# EAGLE board vm_mini_exp5 (EAGLE 6.4)
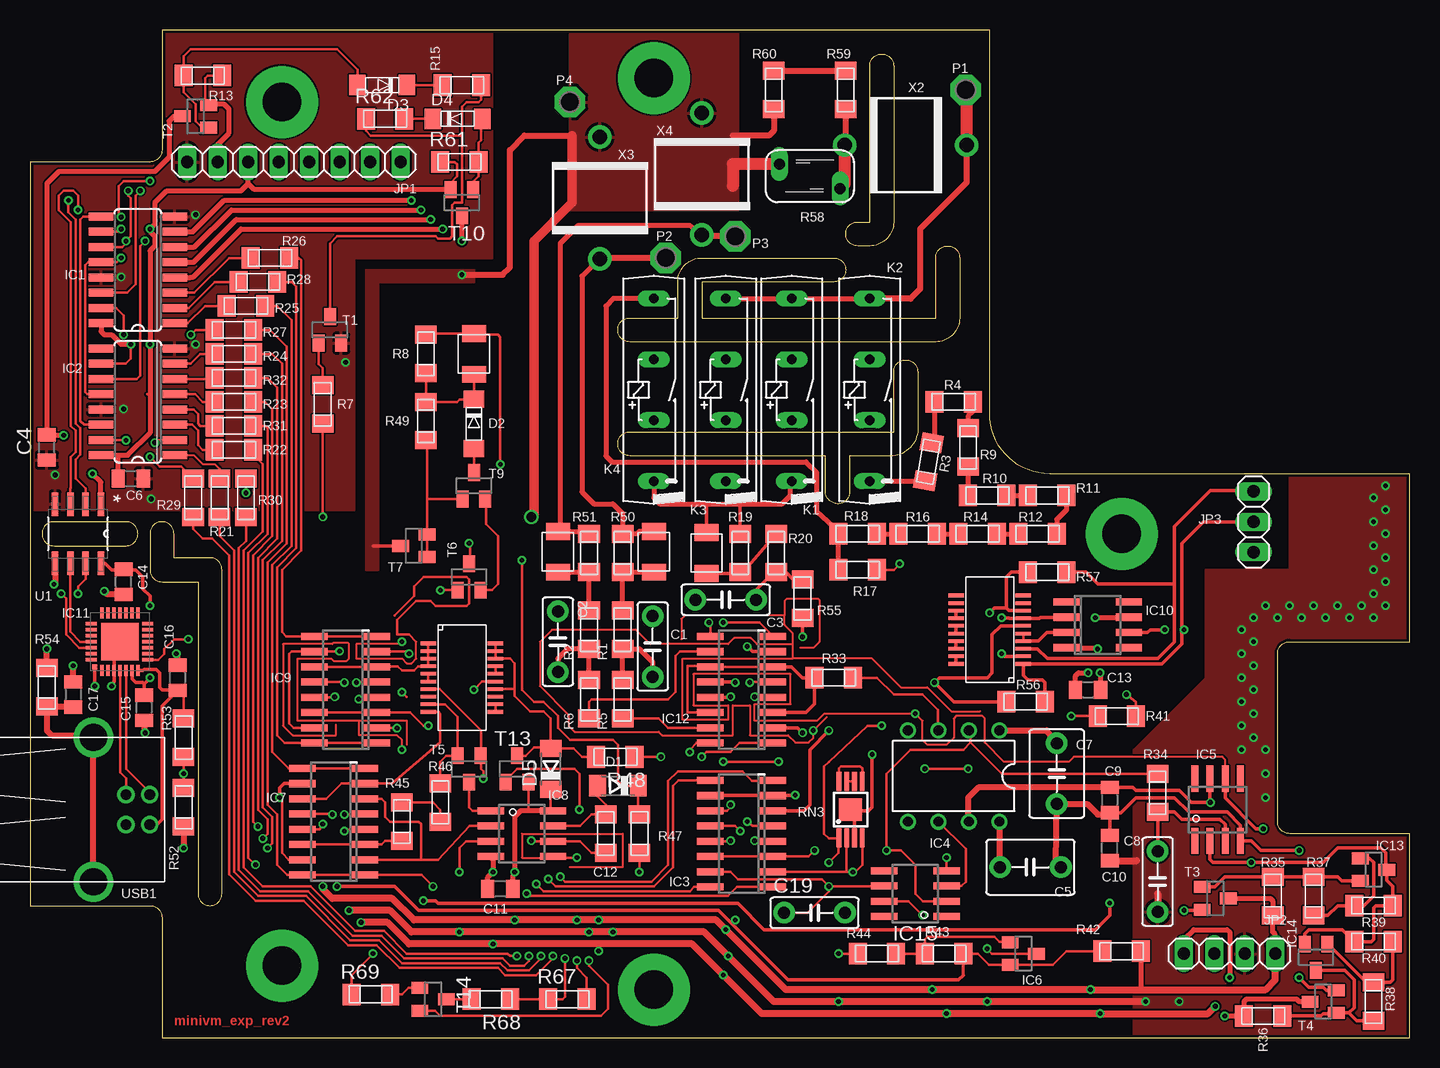
[diagram p0: board, top side]
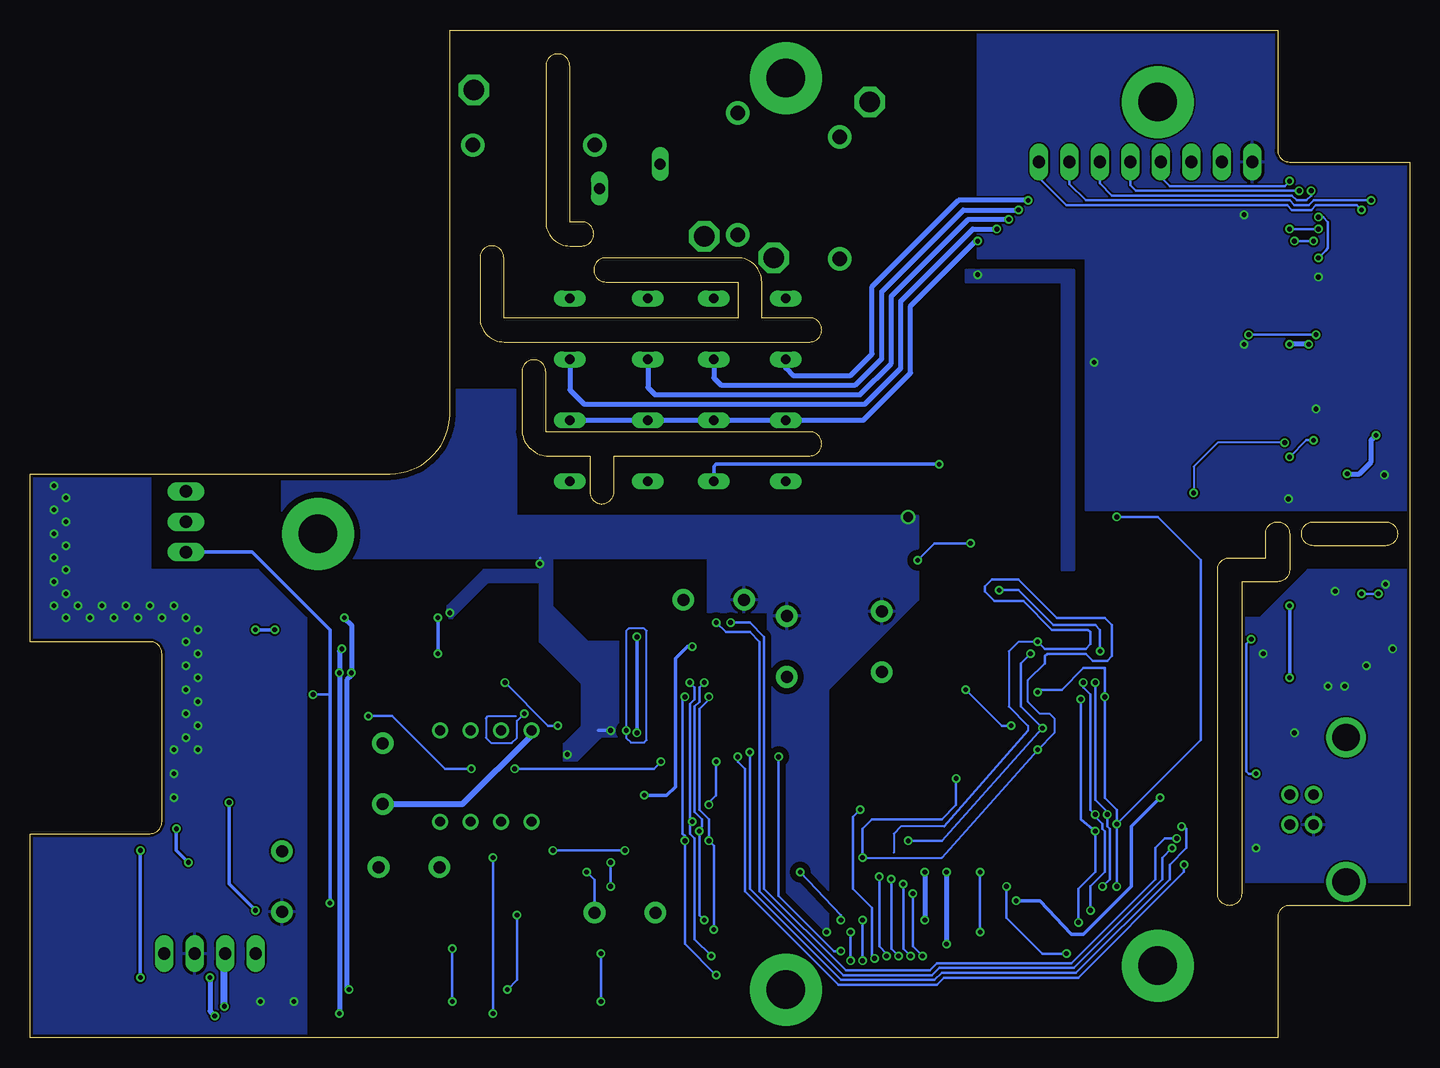
[diagram p1: board, bottom side, seen from below]

Size 115 x 84 mm. Coordinates in mm from the lower left corner, seen from the top.
Outline: 11,84 11,74 arc-90 10,73 0,73 0,11 10,11 arc-90 11,10 11,0 115,0 115,17 105,17 arc-90 104,18 104,32 arc-90 105,33 115,33 115,47 85,47 arc-90 80,52 80,84 11,84
Outline: 50,60 54,60 54,63 arc-90 56,65 67,65 arc-90 68,64 arc-90 67,63 56,63 56,60 75.5,60 75.5,65 arc-90 76.5,66 arc-90 77.5,65 77.5,60 arc-90 75.5,58 50,58 arc-90 49,59 arc-90 50,60
Outline: 50,50.5 72,50.5 72,55.5 arc-90 73,56.5 arc-90 74,55.5 74,50.5 arc-90 71.5,48.5 68.3,48.5 68.3,45.5 arc-90 67.4,44.5 arc-90 66.3,45.5 66.3,48.5 50,48.5 arc-90 49,49.5 arc-90 50,50.5
Outline: 16,12 16,39 arc90 15,40 12,40 12,42 arc90 11,43 arc90 10,42 10,39 arc90 11,38 14,38 14,12 arc90 15,11 arc90 16,12
Outline: 2,43 arc90 1,42 arc90 2,41 8,41 arc90 9,42 arc90 8,43 2,43
Outline: 70,81 arc-90 71,82 arc-90 72,81 72,68 arc-90 70,66 69,66 arc-90 68,67 arc-90 69,68 70,68 70,81
Copper layers (1*16): Top 0.035mm / dielectric 1.5mm / Bottom 0.035mm
Design rules "Fusion_eagle_rule_v1.1": minimum track width 6mil, minimum drill 0.3mm, track to track 6mil, track to pad 6mil, pad to pad 6mil, via to via 6mil, smd to smd 0mil, copper to edge 10mil, drill to drill 10mil, minimum pad ring 10mil, minimum via ring 6mil, stop-mask expansion 2mil, vias tented up to drill 100mil, thermal gap 10mil

## Footprints (pad centres in the part's own frame; a part is rotated, then mirrored left to right if it is on the bottom)
C050-025X075 = drill 1 pad 1.8: 1 -2.54,0; 2 2.54,0
R0805 = smd 1.1 x 1.5: 1 -1.05,0; 2 1.05,0
C050-045X075 = drill 1 pad 1.8: 1 -2.54,0; 2 2.54,0
R_MINIMELF = smd 1.5 x 1.8: P$1 -1.6,0; P$2 1.6,0
SOD80C = smd 1.4 x 1.8: A 1.7,0; C -1.7,0
SOD-80 = smd 1.397 x 1.702: A 1.905,0; K -2.223,0
SO16 = smd 0.66 x 2.032: 1 -4.445,-3.073; 2 -3.175,-3.073; 3 -1.905,-3.073; 4 -0.635,-3.073; 5 0.635,-3.073; 6 1.905,-3.073; 7 3.175,-3.073; 8 4.445,-3.073; 9 4.445,3.073; 10 3.175,3.073; 11 1.905,3.073; 12 0.635,3.073; 13 -0.635,3.073; 14 -1.905,3.073; 15 -3.175,3.073; 16 -4.445,3.073
SO-16 = smd 0.6 x 2.2: 1 -4.445,-2.917; 2 -3.175,-2.917; 3 -1.905,-2.917; 4 -0.635,-2.917; 5 0.635,-2.917; 6 1.905,-2.917; 7 3.175,-2.917; 8 4.445,-2.917; 9 4.445,2.283; 10 3.175,2.283; 11 1.905,2.283; 12 0.635,2.283; 13 -0.635,2.283; 14 -1.905,2.283; 15 -3.175,2.283; 16 -4.445,2.283
DIL08 = drill 0.813 pad 1.27: 1 -3.81,-3.81; 2 -1.27,-3.81; 3 1.27,-3.81; 4 3.81,-3.81; 5 3.81,3.81; 6 1.27,3.81; 7 -1.27,3.81; 8 -3.81,3.81
SO08 = smd 0.6 x 2.2: 1 -1.905,-2.6; 2 -0.635,-2.6; 3 0.635,-2.6; 4 1.905,-2.6; 5 1.905,2.6; 6 0.635,2.6; 7 -0.635,2.6; 8 -1.905,2.6
SOT23 = smd 1 x 1.4: 1 -0.95,-1.1; 2 0.95,-1.1; 3 0,1.1
MLP28 = smd 0.9 x 0.3: 1 -2.4,1.5; 2 -2.4,1; 3 -2.4,0.5; 4 -2.4,0; 5 -2.4,-0.5; 6 -2.4,-1; 7 -2.4,-1.5; 15 2.4,-1.5; 16 2.4,-1; 17 2.4,-0.5; 18 2.4,0; 19 2.4,0.5; 20 2.4,1; 21 2.4,1.5 | smd 0.3 x 0.9: 8 -1.5,-2.3; 9 -1,-2.3; 10 -0.5,-2.3; 11 0,-2.3; 12 0.5,-2.3; 13 1,-2.3; 14 1.5,-2.3; 22 1.5,2.4; 23 1,2.4; 24 0.5,2.4; 25 0,2.4; 26 -0.5,2.4; 27 -1,2.4; 28 -1.5,2.4 | smd 3.1 x 3.1: EXP 0,0 | smd 0.435 x 0.435: M -2.103,2.103
1X08 = drill 1.016 long: 1 -8.89,0; 2 -6.35,0; 3 -3.81,0; 4 -1.27,0; 5 1.27,0; 6 3.81,0; 7 6.35,0; 8 8.89,0
1X04 = drill 1.016 long: 1 -3.81,0; 2 -1.27,0; 3 1.27,0; 4 3.81,0
1X03 = drill 1.016 long: 1 -2.54,0; 2 0,0; 3 2.54,0
HE3621 = drill 0.813 long: 1 -7.62,0; 2 -2.54,0; 3 2.54,0; 4 7.62,0
P1-17 = drill 1.702 pad 2.54 octagon: TP 0,0
S05K175 = drill 0.914 long: 1 -1.016,-2.54; 2 1.016,2.54
OSOP20 = smd 0.3 x 1.27: 1 -2.857,-2.8; 2 -2.223,-2.8; 3 -1.587,-2.8; 4 -0.953,-2.8; 5 -0.318,-2.8; 6 0.318,-2.8; 7 0.953,-2.8; 8 1.587,-2.8; 9 2.223,-2.8; 10 2.857,-2.8; 11 2.857,2.8; 12 2.223,2.8; 13 1.587,2.8; 14 0.953,2.8; 15 0.318,2.8; 16 -0.318,2.8; 17 -0.953,2.8; 18 -1.587,2.8; 19 -2.223,2.8; 20 -2.857,2.8
MSOP8-EP = smd 0.4 x 1.6: 1 -0.975,-2.35; 2 -0.325,-2.35; 3 0.325,-2.35; 4 0.975,-2.35; 5 0.975,2.35; 6 0.325,2.35; 7 -0.325,2.35; 8 -0.975,2.35 | smd 1.9 x 1.9: EP 0,0
SOIC127P600X175-8N = smd 1.981 x 0.559: 1 -2.464,1.905; 2 -2.464,0.635; 3 -2.464,-0.635; 4 -2.464,-1.905; 5 2.464,-1.905; 6 2.464,-0.635; 7 2.464,0.635; 8 2.464,1.905
1210 = smd 1.4 x 2: 1 -1.7,0; 2 1.7,0
USB-B-H = drill 0.914: D+ 0,1.25; D- 1.981,1.25; GND 0,-1.25; VBUS 1.981,-1.25 | drill 2.286: GND@1 -2.718,6.02; GND@2 -2.718,-6.02
EPCOS_N81 = drill 1.2 pad 1.93: 1 -5.08,0; 2 5.08,0

## Placement (x,y rotation side)
C1  4n7  [C050-025X075]  51.9,32.6 270 top
C2  4n7  [C050-025X075]  44,33 270 top
C3  4n7  [C050-025X075]  58,36.5 0 top
C4  100n  [R0805]  1.4,49.2 90 top
C5  100n  [C050-045X075]  83.4,14.2 180 top
C6  100n  [R0805]  8.4,46.6 0 top
C7  100n  [C050-045X075]  85.6,22 90 top
C8  4n7  [C050-025X075]  94,13 90 top
C9  100n  [R0805]  90,19.8 270 top
C10  100n  [R0805]  90,15.8 90 top
C11  100n  [R0805]  39.2,12.4 180 top
C12  330p  [R_MINIMELF]  48,17 90 top
C13  100n  [R0805]  88.2,29 0 top
C14  100n  [R0805]  7.8,38 90 top
C15  1u  [R0805]  9.5,27.5 270 top
C16  1u  [R0805]  12.3,30 270 top
C17  100n  [R0805]  3.6,28.6 270 top
C19  4n7  [C050-025X075]  65.4,10.4 0 top
D1  6v8  [SOD80C]  49,21 180 top
D2  BAV103  [SOD-80]  37,51 270 top
D3  BAV103  [SOD-80]  29.2,79.4 180 top
D4  BAV103  [SOD-80]  35.8,76.6 0 top
D5  4V3  [SOD80C]  43.4,22.4 90 top
IC1  74AHCT595  [SO16]  9,64 90 top
IC2  74AHCT595  [SO16]  9,53 90 top
IC3  DG211  [SO-16]  59,17 90 top
IC4  LTC1052  [DIL08]  77,21.8 180 top
IC5  TL061  [SO08]  99,19 0 top
IC6  TL431_SOT23  [SOT23]  82.8,7 270 top
IC7  DG211  [SO-16]  25,18 90 top
IC8  OPA2192  [SO08]  41,17 270 top
IC9  DG211  [SO-16]  26,29 90 top
IC10  OPA177  [SO08]  89,34.4 270 top
IC11  CP2102  [MLP28]  7.5,33 90 top
IC12  DG211  [SO-16]  59,29 90 top
IC13  TL431_SOT23  [SOT23]  112,14 270 top
IC14  TL431_SOT23  [SOT23]  107.2,6.7 180 top
IC15  TL061  [SO08]  73.8,12 90 top
JP1  [1X08]  22,73 180 top
JP2  [1X04]  100,7 180 top
JP3  [1X03]  102,43 90 top
K1  HE3621  [HE3621]  63.5,54 90 top
K2  HE3621  [HE3621]  70,54 90 top
K3  HE3621  [HE3621]  58,54 90 top
K4  HE3621  [HE3621]  52,54 90 top
P1  TPPAD1-17  [P1-17]  78,79 0 top
P2  TPPAD1-17  [P1-17]  53,65 0 top
P3  TPPAD1-17  [P1-17]  58.8,66.8 0 top
P4  TPPAD1-17  [P1-17]  45,78 0 top
R1  120k  [R_MINIMELF]  49.4,34 90 top
R2  120k  [R_MINIMELF]  46.6,34 90 top
R3  1M  [R_MINIMELF]  74.9,48 260 top
R4  1M  [R_MINIMELF]  77,53 0 top
R5  120k  [R_MINIMELF]  49.4,28.2 90 top
R6  120k  [R_MINIMELF]  46.6,28.2 90 top
R7  62k  [R_MINIMELF]  24.4,52.8 270 top
R8  620R  [R_MINIMELF]  33,57 270 top
R9  1M  [R_MINIMELF]  78.2,49.2 90 top
R10  1M  [R_MINIMELF]  79.8,45.2 0 top
R11  1M  [R_MINIMELF]  84.8,45.2 180 top
R12  1M  [R_MINIMELF]  84,42 180 top
R13  240k  [R_MINIMELF]  14.4,80.2 180 top
R14  1M  [R_MINIMELF]  79,42 0 top
R15  12k  [R_MINIMELF]  36,79.4 180 top
R16  1M  [R_MINIMELF]  74,42 180 top
R17  1M  [R_MINIMELF]  69,39 0 top
R18  1M  [R_MINIMELF]  69,42 0 top
R19  620R  [R_MINIMELF]  59.2,40.4 270 top
R20  240k  [R_MINIMELF]  62.2,40.4 90 top
R21  620R  [R_MINIMELF]  15.8,45 90 top
R22  620R  [R_MINIMELF]  17,49 180 top
R23  620R  [R_MINIMELF]  17,53 180 top
R24  620R  [R_MINIMELF]  17,57 180 top
R25  620R  [R_MINIMELF]  18,61 180 top
R26  620R  [R_MINIMELF]  20,65 180 top
R27  620R  [R_MINIMELF]  17,59 180 top
R28  620R  [R_MINIMELF]  19,63 180 top
R29  620R  [R_MINIMELF]  13.6,45 90 top
R30  620R  [R_MINIMELF]  18,45 90 top
R31  620R  [R_MINIMELF]  17,51 180 top
R32  620R  [R_MINIMELF]  17,55 180 top
R33  22R  [R_MINIMELF]  67,30 0 top
R34  12k  [R_MINIMELF]  94,20.4 270 top
R35  12k  [R_MINIMELF]  103.6,11.8 270 top
R36  12k  [R_MINIMELF]  102.8,1.8 0 top
R37  93k  [R_MINIMELF]  107,11.8 270 top
R38  39k  [R_MINIMELF]  112,3 90 top
R39  39k  [R_MINIMELF]  112,11 180 top
R40  93k  [R_MINIMELF]  112,8 0 top
R41  620R  [R_MINIMELF]  90.6,26.8 0 top
R42  93k  [R_MINIMELF]  91,7.2 0 top
R43  120k  [R_MINIMELF]  76.2,7 180 top
R44  39k  [R_MINIMELF]  70.6,7 0 top
R45  1M  [R_MINIMELF]  31,18 90 top
R46  1M  [R_MINIMELF]  34.2,19.6 90 top
R47  39k  [R_MINIMELF]  50.8,17 90 top
R48  39k  [R_MINIMELF]  48.8,23.4 180 top
R49  240k  [R_MINIMELF]  33,51.4 270 top
R50  620R  [R_MINIMELF]  49.4,40.4 270 top
R51  620R  [R_MINIMELF]  46.6,40.4 270 top
R52  62k  [R_MINIMELF]  12.8,19.2 270 top
R53  39k  [R_MINIMELF]  12.8,25 270 top
R54  620R  [R_MINIMELF]  1.4,29.2 90 top
R55  240k  [R_MINIMELF]  64.4,36.6 90 top
R56  0R  [R_MINIMELF]  83,28 180 top
R57  0R  [R_MINIMELF]  84.8,38.8 180 top
R58  S05K120  [S05K175]  65,71.8 270 top
R59  620K  [R_MINIMELF]  68,79 270 top
R60  620K  [R_MINIMELF]  62,79 90 top
R61  240k  [R_MINIMELF]  35.8,73 0 top
R62  12k  [R_MINIMELF]  29.6,76.6 0 top
R67  240k  [R_MINIMELF]  44.8,3.2 0 top
R68  62K  [R_MINIMELF]  38.4,3.2 180 top
R69  12K  [R_MINIMELF]  28.4,3.6 0 top
RN1  OSOP20  [OSOP20]  80,34 90 top
RN2  OSOP20  [OSOP20]  36,30 270 top
RN3  LT5400  [MSOP8-EP]  68.4,19 0 top
T1  BC847  [SOT23]  25,59 0 top
T2  BC857  [SOT23]  13.8,76.8 90 top
T3  BC847  [SOT23]  98.8,11.6 270 top
T4  BC857  [SOT23]  107.8,3 90 top
T5  MMBFJ110  [SOT23]  36.6,22.4 180 top
T6  MMBFJ175  [SOT23]  36.6,38.4 0 top
T7  JFET_N  [SOT23]  32,41 90 top
T9  BF823  [SOT23]  37,46 0 top
T10  BC857  [SOT23]  36,69.6 180 top
T13  BC857  [SOT23]  40.6,22.4 0 top
T14  BC847  [SOT23]  33.6,3.2 270 top
U1  ADUM1201ARZ  [SOIC127P600X175-8N]  4,42 270 top
U$1  INDUCTOR_GEN1210  [1210]  37,57 90 top
U$2  INDUCTOR_GEN1210  [1210]  56.4,40.4 90 top
U$7  INDUCTOR_GEN1210  [1210]  52,40.5 90 top
U$8  INDUCTOR_GEN1210  [1210]  44,40.5 90 top
USB1  USB-B-H  [USB-B-H]  8,19 0 top
X2  135V  [EPCOS_N81]  73,74.4 0 top
X3  135V  [EPCOS_N81]  47.5,70 270 top
X4  135V  [EPCOS_N81]  56,72 270 top

## Library data of the parts
C1-C3 C5 C7 C8 C19 = _rcl
C4 C6 C9-C17 R1-R57 R59-R62 R67-R69 U$1 U$2 U$7 U$8 = _moja
D1 D5 = diode
D2-D4 IC3 IC6 IC7 IC9 IC12-IC14 RN3 T1-T7 T9 T10 T13 T14 = _mcom6
IC1 IC2 = 74xx-eu
IC4 IC5 IC8 IC15 = _linear
IC10 = linear
IC11 = silabs; MF: FARNELL; MPN: CP2102-GM; OC_FARNELL: 9282130; OC_NEWARK: 30K5635
JP1-JP3 = pinhead-2
K1-K4 = relay
P1-P4 = testpad
R58 = varistor
RN1 RN2 = _moja_e
U1 = _mcom6; MPN: ADUM1201ARZ; OC_FARNELL: 1078200; OC_NEWARK: 19M0753; PACKAGE: SOIC-8; SUPPLIER: Analog Devices
USB1 = con-usb-2
X2-X4 = discrete

## Nets
+5V: C6.1 IC1.10 IC1.16 IC2.10 IC2.16 JP1.6 R61.P$1 T10.2
+18V: C11.1 C13.1 D5.C IC3.13 IC7.13 IC8.8 IC9.13 IC10.7 IC12.13 IC15.7 JP2.1 R7.P$2 R35.P$2 R42.P$2 R47.P$1 R67.P$2 T3.3 T13.2
-14V: C11.2 C13.2 IC3.4 IC7.4 IC8.4 IC9.4 IC10.4 IC12.4 IC15.4 JP2.3 R48.P$1
-18V: JP2.4 R36.P$1 T4.3
AD_HI: IC10.6 JP3.2 R56.P$1 RN1.1
AD_LO: JP3.3 R57.P$1 RN1.3
AGND: C1.1 C2.1 C3.1 C8.1 C10.1 IC3.5 IC3.6 IC6.3 IC7.5 IC8.3 IC9.5 IC12.5 JP2.2 P4.TP R17.P$2 R44.P$1 R57.P$2 R58.1 R60.P$1 RN1.8 RN3.3 RN3.EP T7.3 T14.2 X3.1 X4.1
AGND1: IC14.3 R36.P$2 R38.P$1 T4.1
AMP_OUT: C19.1 IC3.15 IC15.6 R56.P$2 RN1.6 RN3.1
GND: C4.1 C6.2 IC1.8 IC1.13 IC2.8 IC2.13 JP1.8 T1.2 U1.4
GNDIO: C14.1 C15.2 C16.1 C17.1 IC11.3 IC11.EXP IC11.M R52.P$2 R54.P$2 U1.5 USB1.GND
M1_1: IC12.1 R31.P$1
M1_2: IC12.16 R23.P$1
M1_3: IC12.9 R32.P$1
M1_4: IC12.8 R24.P$1
M2_1: IC3.1 R22.P$1
M2_2: IC3.16 R30.P$1
M2_3: IC3.9 R21.P$1
M2_4: IC3.8 R29.P$1
M3_A: IC7.1 IC7.16 R27.P$1 R69.P$1
M3_B: IC7.8 IC7.9 R25.P$1
M3_C: IC9.1 IC9.16 R28.P$1
M3_D: IC9.8 IC9.9 R26.P$1
N$1: JP1.1 U1.3
N$2: JP1.2 U1.2
N$3: IC11.4 USB1.D+
N$4: IC11.5 USB1.D-
N$5: C16.2 IC11.7 R53.P$1 USB1.VBUS
N$6: IC3.7 IC3.10 IC12.7
N$7: RN3.5 RN3.8
N$8: C19.2 IC3.2 RN3.2 RN3.4
N$9: RN3.6 RN3.7
N$15: R3.P$1 R4.P$1
N$16: IC12.3 IC12.6 IC12.11 IC12.14 R33.P$1
N$17: R4.P$2 R9.P$2
N$18: R9.P$1 R10.P$1
N$19: R10.P$2 R11.P$2
N$20: R11.P$1 R12.P$1
N$21: R12.P$2 R14.P$2
N$22: R14.P$1 R16.P$1
N$23: R16.P$2 R18.P$2
N$24: K4.4 R17.P$1 R18.P$1
N$25: K2.1 R3.P$2
N$26: IC1.5 K1.3
N$27: R19.P$2 R20.P$2 U$2.1
N$28: IC1.4 K2.3
N$29: IC1.6 K3.3
N$30: C3.2 R20.P$1 R55.P$2
N$31: IC4.3 R33.P$2
N$32: IC1.7 K4.3
N$33: C1.2 R1.P$1 R5.P$2
N$34: IC5.2 IC5.6 IC13.3 IC14.2 R39.P$1 R40.P$1
N$35: C5.2 IC4.8
N$36: C7.2 IC4.1
N$37: C2.2 R2.P$1 R6.P$2
N$38: IC12.15 R5.P$1
N$39: R58.2 R59.P$2 X2.1
N$40: C8.2 IC5.3 R34.P$2
N$41: IC12.10 R6.P$1
N$42: RN1.19 RN1.20
N$43: IC8.5 RN2.7 T5.1
N$44: IC1.9 IC2.14
N$45: RN1.17 RN1.18
N$46: IC1.15 R27.P$2
N$47: IC1.1 R25.P$2
N$48: IC1.2 R28.P$2
N$49: IC1.3 R26.P$2
N$50: IC11.26 U1.7
N$51: IC11.25 U1.6
N$52: C14.2 C15.1 IC11.6 U1.8
N$53: IC11.8 R52.P$1 R53.P$2
N$54: IC2.15 R29.P$2
N$55: IC2.1 R21.P$2
N$56: C17.2 R54.P$1 USB1.GND@1 USB1.GND@2
N$57: R15.P$1 R62.P$1 T1.3
N$58: IC3.3 IC3.14 IC4.2 IC15.2 R34.P$1
N$59: IC2.2 R30.P$2
N$60: IC2.3 R22.P$2
N$61: D3.A R13.P$2 T2.1
N$62: D4.K R62.P$2
N$63: IC2.4 R31.P$2
N$64: R7.P$1 T1.1
N$65: IC12.2 R55.P$1
N$66: R59.P$1 R60.P$2
N$67: IC3.11 R41.P$1
N$68: IC2.7 R24.P$2
N$69: IC2.6 R32.P$2
N$70: IC2.5 R23.P$2
N$71: RN2.5 RN2.6
N$72: RN2.11 RN2.12
N$73: IC9.3 IC9.14 RN2.15
N$74: C12.P$1 IC8.6 IC9.2 IC9.7
N$75: IC9.6 IC9.11 RN2.1 RN2.2 RN2.3 RN2.4
N$76: IC7.3 IC7.14 R45.P$1
N$77: RN2.16 RN2.17
N$78: IC8.1 T5.3
N$79: R46.P$2 RN2.9 T5.2
N$80: IC9.10 IC9.15 T6.1
N$81: IC7.7 IC7.11 RN2.10
N$82: IC13.2 R35.P$1 R37.P$1 T3.1
N$83: IC13.1 R37.P$2 R39.P$2
N$84: C12.P$2 D1.A IC8.7
N$85: R45.P$2 R46.P$1
N$86: D1.C R47.P$2 T6.3
N$87: IC7.2 IC7.6 IC8.2
N$88: R49.P$2 T7.1 T7.2 T9.1
N$89: RN1.15 RN1.16
N$90: RN1.13 RN1.14
N$91: IC6.1 R43.P$2 R44.P$2
N$92: IC14.1 R38.P$2 R40.P$2
N$93: T6.2 T9.2
N$94: D2.A T9.3
N$95: IC10.3 RN1.4 RN1.5
N$96: IC10.2 RN1.2 RN1.7
N$98: P3.TP R51.P$1 U$8.2 X4.2
N$99: P2.TP R50.P$1 U$7.2 X3.2
N$100: K1.1 K4.1 R19.P$1 U$2.2
N$101: K3.1 R8.P$1 U$1.2
N$102: JP1.7 R13.P$1 T2.2
N$103: D4.A R61.P$2 T10.1
N$104: IC4.6 IC15.3
N$106: C4.2 T2.3 U1.1
N$107: D3.K R15.P$2
N$108: D5.A R48.P$2 RN2.14 RN2.18 RN2.19 RN2.20 T13.3
N$117: R67.P$1 R68.P$1 T13.1
N$118: R68.P$2 T14.3
N$119: R69.P$2 T14.1
OHM_CUR: D2.K R8.P$2 R49.P$1 U$1.1
SR_CLK: IC1.11 IC2.11 JP1.3
SR_DAT: IC1.14 JP1.4
SR_LAT: IC1.12 IC2.12 JP1.5
T_INP: K1.4 K2.4 K3.4 P1.TP X2.2
T_SENH: R1.P$2 R50.P$2 U$7.1
T_SENL: R2.P$2 R51.P$2 U$8.1
V+: C9.1 IC4.7 IC5.7 T3.2
V-: C5.1 C7.1 C9.2 C10.2 IC4.4 IC5.4 T4.2
V_REL: K1.2 K2.2 K3.2 K4.2 T10.3
VCC: IC3.12 IC6.2 IC7.12 IC9.12 IC12.12 R42.P$1 R43.P$1
VREF-7V: IC7.10 IC7.15 JP3.1 R41.P$2

## Tracks (layer width: path | path; a pad name or v marks a point on that pad's centre or on a via)
+5V  (via drill 0.4)
  Top 0.2: 9.77,53.63 10,53.6 | IC2.10 7.97,56.17 8.4,56.6 v8.4,57.8 | IC1.10 7.38,67.17 v7.6,67.4 | T10.2 35.05,71.25 35.6,71.8 35.6,72.8 35.4,73 R61.P$1
  Top 0.4: IC2.16 7.4,48.55 | 7.4,48.55 8.15,48.55 10,50.4 10,53.6 v10,57.8 10,65.6 10.4,66 10.4,66.8 10,67.2 v10,67.4 10.4,67.8 10.4,69.6 11.4,70.6 17.6,70.6 18.2,71.2 | C6.1 7.35,48.51 7.4,48.55 | IC1.16 5.93,58.87 6.2,58.6 6.8,58.6 7.6,57.8 v8.4,57.8 | T10.2 18.7,70.7 18.2,71.2 | 18.2,71.2 JP1.6
  Bottom 0.2: v7.6,67.4 v10,67.4 10.2,67.6
  Bottom 0.4: v8.4,57.8 v10,57.8
+18V  (via drill 0.4)
  Top 0.2: IC7.13 24.16,17.36 v24.4,17.8 | IC9.13 25.36,28.36 v25.4,28.4 | 58.23,28.36 v58.4,28.4 | 31.41,28.41 v31,28.8 | v24.4,43.4 R7.P$2 | R47.P$1 v50.8,13.8 | IC3.13 58.37,16.36 v58.4,16.4 | D5.C 43.4,19.11 IC8.8 | T13.2 41.55,18.95 41.6,18.91 | R67.P$2 46.4,5 45.6,5.8 v45.6,6.4 | IC15.7 73.23,11.37 v74.4,10.2
  Top 0.3: IC12.13 58.4,28.36 v58.4,28.4
  Top 0.4: IC8.8 41.6,18.91 40.91,18.91 40.4,18.4 v40.4,13.8 40.25,13.45 C11.1 | IC10.7 91.17,35.03 90.8,35 v88.8,35 | C13.1 87.15,30.15 87.4,30.4 v88.2,30.4 | JP2.1 103.81,8.59 103.6,8.8 R35.P$2 103.6,11.4 103.4,11.6 T3.3 | R42.P$2 92.6,4
  Top 0.6: v24.4,12.6 24.4,12.4 25.2,11.6 30.2,11.6 32,9.8 v40.4,9.8 v45.6,9.8 v47.4,9.8 57.2,9.8 v58,9 63,4 v75.2,4 v88.4,4 92.6,4 103,4 103.8,4.8 JP2.1
  Bottom 0.2: v24.4,17.8 v24.4,12.6 | v24.4,17.8 24.4,19 25.4,20 v25.4,28.4 25.4,30.8 27.2,30.8 29,29 30.8,29 v31,28.8 | v58,9 58,16 v58.4,16.4 58.4,18.2 59.2,19 59.2,27.4 58.4,28.2 v58.4,28.4 | v50.8,13.8 47.4,10.2 v47.4,9.8 | v24.4,43.4 21,43.4 17.4,39.8 17.4,24.8 v24.4,17.8 | v45.6,6.4 v45.6,9.8 | v74.4,10.2 74.4,4.8 v75.2,4
  Bottom 0.4: v40.4,13.8 v40.4,9.8 | v88.8,35 88.2,34.4 v88.2,30.4 88.2,30.2 88.6,29.8 88.6,4.2 v88.4,4
-14V  (via drill 0.4)
  Top 0.2: IC7.4 26.64,17.36 v26.2,17.2 | IC9.4 27.57,28.36 v27.4,28.2 | v60.4,28.4 61.88,28.4 IC12.4 | 88.91,32.49 v89,32.4 | IC3.4 60.44,16.36 v60.4,16.4 | R48.P$1 v52.6,23.4 | v47.4,7.2 47.4,7.8 | IC15.4 v76.4,15
  Top 0.4: IC8.4 38.51,14.89 38.6,14.8 v38.6,13.8 38.15,13.35 C11.2 | IC10.4 88.91,32.49 | C13.2 89.25,30.35 v89.2,30.4
  Top 0.6: v27.6,9.6 29.8,9.6 31.6,7.8 v38.6,7.8 47.4,7.8 55.2,7.8 v57.8,5.2 61,2 v76.4,2 v89.2,2 98.2,2 v98.8,2.6
  Bottom 0.2: v27.6,9.6 27.6,12.4 26.2,13.8 v26.2,17.2 27.4,18.2 v27.4,28.2 | v57.8,5.2 60.4,7.8 v60.4,16.4 60.4,16.8 60.6,17 60.6,28.2 v60.4,28.4 | v52.6,23.4 52.6,11.8 48,7.2 v47.4,7.2 | v76.4,15 v76.4,2
  Bottom 0.4: v38.6,13.8 v38.6,7.8 | v89,32.4 89.2,32.2 v89.2,30.4 v89.2,2
  Bottom 0.6: v98.8,2.6 98.8,6.93 JP2.3
-18V  (via drill 0.4)
  Top 0.4: JP2.4 96.19,8.19 97,9 99.8,9 100,8.8 v100,5 | v99.6,1.8 R36.P$1 101.2,3 101.4,3.2 105.6,3.2 105.8,3 T4.3
  Bottom 0.4: v100,5 100,2.2 v99.6,1.8
AD_HI  (via drill 0.4)
  Top 0.3: 96,34 96,32.8 94.34,31.14 RN1.1 82.8,30.2 83.2,29.8 84.4,29.8 84.6,29.6 R56.P$1 | 96,34 96,41.2 97.8,43 JP3.2 | v94.6,34 93.4,34 93.17,33.77 IC10.6 91.56,33.8 | v96.2,34 96,34
  Bottom 0.3: v94.6,34 v96.2,34
AD_LO
  Top 0.2: 101.94,45.6 JP3.3
  Top 0.3: RN1.3 83.99,32.41 84.8,31.6 94,31.6 95.4,33 95.4,37.8 | 95.4,37.8 95.4,42.6 98.4,45.6 101.94,45.6 | 95.4,37.8 89,37.8 88,38.8 R57.P$1
AGND  (via drill 0.4, 0.8)
  Top 0.2: IC9.5 27.23,29.64 v27.2,29.6 | v26.2,18.6 27.88,18.6 IC7.5 | v59.8,18 60.23,17.64 IC3.5 | 60.03,29.64 v60,29.6 60,29.64 IC12.5 | v79.8,7.4 80.2,7 IC6.3 | R44.P$1 v67.4,7 | 68.72,18.68 RN3.EP | R17.P$2 72,39 v72.5,39.5 | IC8.3 36.37,16.36 35.8,15.8 v35.8,13.8 | T14.2 33.75,2.25 34.2,1.8 47.6,1.8 48.2,2.4 48.2,4.4 46.6,6 v46.6,6.4
  Top 0.3: RN3.3 68.72,18.68 | v70.2,23.6 70.2,19.2 69.91,18.91 68.31,18.91 RN3.EP | RN1.8 81.61,35.59 81.4,35.8 | 81.4,35.8 80.4,35.8 v80,35.4 | T7.3 28.6,41 | IC3.6 64.5,18.91 65,19.4 65,24 v66.6,25.6 | R57.P$2 81.8,38.8 81.4,38.4 81.4,35.8
  Top 0.5: v36,63.6 39.4,63.6 40,64.2 40,74 41.2,75.2 45.2,75.2 | R60.P$1 62,75.6 61.6,75.2 58.6,75.2
  Top 0.6: v93,3 v79.8,3 v67.4,3 62,3 v58.2,6.8 56.2,8.8 v48.6,8.8 v46.6,8.8 v35.8,8.8 31.8,8.8 30,10.6 v26.6,10.6 | C10.1 92.25,14.75 | 94,12 C8.1
  Top 0.8: 45.2,75.2 45.2,69.6 42,66.4 42,43.6 v41.8,43.4
  Top 1: R58.1 58.6,72.82 58.6,71
  Bottom 0.2: v27.2,29.6 27.2,29.2 26.6,28.6 26.6,19 v26.2,18.6 26.2,18.4 25.6,17.8 25.6,17.4 25.4,17.2 25.4,13.8 26.6,12.6 v26.6,10.6 | v58.2,6.8 59.6,8.2 59.6,16.6 60,17 60,17.8 v59.8,18 60,18.2 60,27.8 59.6,28.2 59.6,29.2 v60,29.6 | v79.8,7.4 v79.8,3 | v67.4,7 v67.4,3 | v72.5,39.5 72.5,40 | v35.8,13.8 v35.8,8.8 | v46.6,6.4 v46.6,8.8
  Bottom 0.3: 72.4,39.4 v72.5,39.5 | v66.6,25.6 67.6,25.6
  Bottom 0.8: v41.8,43.4 41.8,43.2
  other vias: 113,36 111,36 109,36 107,36 105,36 103,36 101,34 101,32 101,30 101,28 101,26 101,24 103,24 103,22 103,20 113,38 113,40 113,42 113,44 113,46 102,25 102,27 102,31 102,33 102,35 104,35 106,35 108,35 110,35 112,35 112,37 112,39 112,41 112,43 112,45 102,29 95.8,3
  pour Bottom (isolate 0.5): 80,54 74.5,54 74.5,43.5 41,43.5 41,36.5 48.5,29 48.5,8.5 53.5,8.5 53.5,35.5 58.5,35.5 58.5,40 71.5,40 71.5,36 68.5,33 65.5,33 65.5,25.1 67.5,25.1 67.5,25 69.5,23 70.5,23 70.5,24.5 69,26 69,29.5 72.5,33 72.5,38 76.8,38 79.8,35 80.2,35 80.2,36 77.2,39 72.5,39 72.5,40 94,40 94,47 83,47 80,50
  pour Top: 45,84 45,69 59,69 59,84
  pour Bottom: 115,0 92,0 92,35 96,39 105,39 105,47 115,47 115,33 105,33 104,32 104,18 105,17 115,17
  pour Top: 115,33 115,47 105,47 105,39 98,39 98,30 92,24 92,0 115,0 115,17 105,17 104,18 104,32 105,33
  pour Top: 28,39 29,39 29,63 37,63 37,64 28,64
  pour Bottom: 29,39 29,63 37,63 37,64 28,64 28,39
AGND1
  Top 0.3: 109.95,2.05 T4.1 108.85,2 107.8,2 107.6,1.8 R36.P$2 | 109.95,2.05 110.6,1.4 R38.P$1 | 109.95,2.05 110.4,2.5 110.4,4.8 109.6,5.6 IC14.3
AMP_OUT  (via drill 0.4)
  Top 0.2: v71,26 69.8,26 66.6,23 66.2,22.6 66.2,17 66.6,16.6 67.38,16.6 RN3.1 67.4,16.62 67.4,15.4 v66.6,14.6 | v66.6,12.6 66,13.2 59,13.2 58.38,13.82 IC3.15 | IC15.6 71.17,12.63 71,12.6 v66.6,12.6 | C19.1 64.8,10.4 66.6,12.2 v66.6,12.6
  Top 0.3: RN1.6 80.92,34.32 80.2,33.6 80.2,30.4 79.8,30 75.8,30 v75.4,29.6 77,28 R56.P$2
  Bottom 0.2: v71,26 71.8,26 v75.4,29.6 | v66.6,12.6 v66.6,14.6
GND  (via drill 0.4)
  other vias: 7.6,63.4 13.8,68.6 13.8,57.8 7.8,52.4 10.1,44.9 2.1,46.9 26.3,56.3
  pour Top: 0,44 27,44 27,65 38.5,65 38.5,84 11,84 11,73 0,73
  pour Bottom: 0,44 27,44 27,65 36,65 36,84 11,84 11,73 0,73
GNDIO  (via drill 0.4)
  Top 0.3: IC11.EXP 7,32.5 IC11.3 7,29.7 v6.8,29.3 | IC11.M 5.4,30.6 v5.4,29.3
  Top 0.5: C16.1 12.3,31.9 v12.2,32 | C15.2 9.5,25.5 v9.6,25.4 | R52.P$2 v12.8,15.8 | U1.5 2.1,37.9 v2,37.8 | C14.1 6.45,36.95 v6.2,37.2 | R54.P$2 v1.4,32.4 | C17.1 v3.6,31
  pour Bottom: 0,13 14,13 14,35 12.5,35 8.5,39 0,39
M1_1  (via drill 0.4)
  Top 0.2: v56,23.4 56.4,23.8 58.4,23.8 59.16,24.55 IC12.1 | R31.P$1 19.6,51 19.8,50.8 19.8,42 18.2,40.4 18.2,15 v18.8,14.4
  Bottom 0.2: v56,23.4 56,23 55.4,22.4 55.4,12.2 47.6,4.4 39.4,4.4 38.8,5 27.6,5 18.8,13.8 v18.8,14.4
M1_2  (via drill 0.4)
  Top 0.2: v55,23.8 55,24 55.55,24.55 IC12.16 | R23.P$1 19.6,53 20.2,52.4 20.2,41.8 18.6,40.2 18.6,18 v19,17.6
  Bottom 0.2: v55,23.8 55,12.4 47.4,4.8 39.6,4.8 39,5.4 27.8,5.4 20,13.2 20,14.4 18.6,15.8 18.6,17.4 v19,17.6
M1_3  (via drill 0.4)
  Top 0.2: v56.6,34.6 56.72,34.48 IC12.9 | R32.P$1 19.8,55 20.6,54.2 20.6,41.6 19,40 19,19 19.8,18.2 19.8,17 v19.4,16.6
  Bottom 0.2: v56.6,34.6 55,34.6 53.8,33.4 53.8,12.4 47,5.6 40,5.6 39.4,6.2 28.2,6.2 21.2,13.2 21.2,15.8 20.4,16.6 v19.4,16.6
M1_4  (via drill 0.4)
  Top 0.2: v57.8,34.6 60.8,34.6 61.92,33.48 IC12.8 | R24.P$1 20.2,57 21,56.2 21,41.4 19.4,39.8 19.4,19.2 20.2,18.4 20.2,16.2 v19.8,15.8
  Bottom 0.2: v57.8,34.6 57,33.8 55,33.8 54.2,33 54.2,12.2 47.2,5.2 39.8,5.2 39.2,5.8 28,5.8 20.6,13.2 20.6,15 v19.8,15.8
M2_1  (via drill 0.4)
  Top 0.2: v41.4,12 41.6,11.8 58.2,11.8 58.95,12.55 IC3.1 | v40.6,6.8 40,6.8 39.8,7 31.4,7 29.5,8.9 27.1,8.9 23.4,12.6 19.4,12.6 17.8,14.2 17.8,40.6 19.4,42.2 19.4,47.8 18.6,48.6 R22.P$1
  Bottom 0.2: v41.4,12 41.4,7.6 v40.6,6.8
M2_2  (via drill 0.4)
  Top 0.2: v42.2,12.8 42.8,12.2 55,12.2 55.35,12.55 IC3.16 | v41.6,6.8 41.6,6.4 41.2,6 40,6 39.4,6.6 31.2,6.6 29.3,8.5 26.9,8.5 23.2,12.2 19.2,12.2 17.4,14 17.4,40.8 18,41.4 R30.P$1
  Bottom 0.2: v42.2,12.8 42.2,7.4 v41.6,6.8
M2_3  (via drill 0.4)
  Top 0.2: v43.2,13.2 43.8,12.6 52,12.6 53.6,14.2 53.6,21 54.05,21.45 IC3.9 | v42.6,6.8 42.6,6.6 41.6,5.6 39.8,5.6 39.2,6.2 31,6.2 29.1,8.1 26.7,8.1 23,11.8 19,11.8 17,13.8 17,40.6 15.8,41.8 R21.P$1
  Bottom 0.2: v43.2,13.2 43.2,7.4 v42.6,6.8
M2_4  (via drill 0.4)
  Top 0.2: v44.2,13.4 44.6,13 51.8,13 53.2,14.4 53.2,21.4 54,22.2 59.4,22.2 60.2,21.4 61.87,21.4 IC3.8 | v43.6,6.8 43.6,6.6 42.2,5.2 39.6,5.2 39,5.8 30.8,5.8 28.9,7.7 26.5,7.7 22.8,11.4 18.8,11.4 16.6,13.6 16.6,40.2 15.2,41.6 14.4,41.6 13.6,42.4 R29.P$1
  Bottom 0.2: v44.2,13.4 44.2,7.6 43.6,7 v43.6,6.8
M3_A  (via drill 0.4)
  Top 0.2: R27.P$1 20,59 21.4,57.6 21.4,41.2 19.8,39.6 19.8,19.4 20.6,18.6 20.6,14.4 21.45,13.55 IC7.16 IC7.1 32.65,13.55 v33.6,12.6 | R69.P$1 26.8,5.2 v28.6,7
  Bottom 0.2: v28.6,7 30.6,7 33.6,10 v33.6,12.6
M3_B
  Top 0.2: IC7.8 IC7.9 21.55,22.45 20.2,23.8 20.2,39.4 21.8,41 21.8,59.8 20.6,61 R25.P$1
M3_C
  Top 0.2: IC9.1 IC9.16 21.25,24.55 20.6,25.2 20.6,39.2 22.2,40.8 22.2,62.6 21.8,63 R28.P$1
M3_D
  Top 0.2: IC9.8 IC9.9 21.36,33.45 21,33.8 21,39 22.6,40.6 22.6,64.8 22.4,65 R26.P$1
N$1  (via drill 0.4)
  Top 0.2: v4,69 4,70.2 3.6,70.6 2.8,70.6 2.4,70.2 2.4,69 3.4,68 3.4,51 3.8,50.6 3.8,48.8 3.4,48.4 3.4,45.8 3.37,45.77 U1.3
  Bottom 0.2: JP1.1 30.89,71.69 28.6,69.4 10.2,69.4 9.8,69 8.2,69 7.8,69.4 4.4,69.4 v4,69
N$2  (via drill 0.4)
  Top 0.2: v3.2,69.8 3.2,68.8 3.8,68.2 3.8,51.2 4.2,50.8 4.2,48.6 3.8,48.2 3.8,46.6 4.63,45.77 U1.2
  Bottom 0.2: JP1.2 28.35,71.15 27,69.8 10,69.8 9.6,69.4 8.4,69.4 8,69.8 v3.2,69.8
N$3
  Top 0.2: IC11.4 7.5,22.1 8,21.6 USB1.D+
N$4
  Top 0.2: IC11.5 8,22.4 10,20.4 10,20.27 USB1.D-
N$5
  Top 0.2: 12.45,29 C16.2 12.8,28.45 R53.P$1
  Top 0.3: IC11.7 9.4,30.6 9.5,30.7 10.5,30.7 10.8,30.4 10.8,29.2 11,29 12.45,29 | USB1.VBUS 10.55,17.75 11,18.2 11,27.65 C16.2
N$6  (via drill 0.4)
  Top 0.3: IC12.7 60.23,32.17 v59.8,32.6 | v63.8,20.2 61.94,20.2 IC3.7 IC3.10
  Bottom 0.3: v59.8,32.6 60.2,32.6 61.2,31.6 61.2,20.89 IC3.7 63.77,20.18 v63.8,20.2
N$7
  Top 0.2: RN3.8 67.42,22.43 67.6,22.6 69.2,22.6 69.38,22.43 RN3.5
N$8  (via drill 0.4)
  Top 0.2: 68,13.82 68.6,13.82 | 68.6,13.82 68.83,13.82 69.4,14.4 69.4,16.62 RN3.4 | RN3.2 68.08,13.9 68,13.82 | IC3.2 68,13.82 | v68.6,13.8 68.6,13.82
  Bottom 0.2: C19.2 67.94,13.14 v68.6,13.8
N$9
  Top 0.2: RN3.7 RN3.6
N$10  (via drill 3.2 pad 6)
  other vias: 21,78
N$11  (via drill 3.2 pad 6)
  other vias: 21,6
N$12  (via drill 3.2 pad 6)
  other vias: 52,4
N$13  (via drill 3.2 pad 6)
  other vias: 52,80
N$14  (via drill 3.2 pad 6)
  other vias: 91,42
N$15
  Top 0.4: R4.P$1 75.4,49.8 R3.P$1
N$16
  Top 0.2: IC12.14 54.8,27.09 54.8,31 56.72,31 IC12.11 IC12.6
  Top 0.3: IC12.3 64.69,27.09 65.4,27.8 R33.P$1 64.4,30 63.49,30.91 IC12.6
N$17
  Top 0.4: R4.P$2 78.6,52.2 78.2,51.8 R9.P$2
N$18
  Top 0.4: R9.P$1 R10.P$1
N$19
  Top 0.4: R10.P$2 R11.P$2
N$20
  Top 0.4: R11.P$1 86.4,44 85.6,43.2 R12.P$1
N$21
  Top 0.4: R14.P$2 R12.P$2
N$22
  Top 0.4: R16.P$1 R14.P$1
N$23
  Top 0.4: R18.P$2 R16.P$2
N$24
  Top 0.4: R17.P$1 R18.P$1 67.4,42.2 65.6,43.8 65.6,47.1 64.7,48 48.5,48 48,48.5 48,61 48.62,61.62 K4.4
N$25
  Top 0.4: K2.1 73.98,46.38 R3.P$2
N$26  (via drill 0.4)
  Top 0.4: IC1.5 13.63,64.64 17.2,68.2 v33.4,68.2
  Bottom 0.4: K1.3 63.5,54.2 62.9,53.6 45.8,53.6 43.2,56.2 43.2,61.8 36.8,68.2 v33.4,68.2
N$27
  Top 0.3: U$2.1 58.9,38.7 R19.P$2 59.6,39 R20.P$2
N$28  (via drill 0.4)
  Top 0.4: IC1.4 13.37,63.37 13.6,63.4 17.6,67.4 v34.4,67.4
  Bottom 0.4: K2.3 70,54 68.8,52.8 45.4,52.8 42.4,55.8 42.4,61.4 36.4,67.4 v34.4,67.4
N$29  (via drill 0.4)
  Top 0.4: IC1.6 13.71,65.91 16.8,69 v32.6,69
  Bottom 0.4: K3.3 58,55 57.4,54.4 46.2,54.4 44,56.6 44,62.2 37.2,69 v32.6,69
N$30
  Top 0.3: 60.64,36.6 C3.2 60.6,36.56 60.6,37.4 62,38.8 R20.P$1 63,38.8 63.6,38.2 R55.P$2
N$31
  Top 0.2: R33.P$2 70.6,30 72,28.6 74.4,28.6 75.7,27.3 75.7,25.64 IC4.3
N$32  (via drill 0.4)
  Top 0.4: IC1.7 13.57,67.17 16.2,69.8 v31.8,69.8
  Bottom 0.4: K4.3 52,55.8 51.4,55.2 46.6,55.2 44.8,57 44.8,62.6 37.6,69.8 v31.8,69.8
N$33
  Top 0.4: R5.P$2 R1.P$1 50.8,32.4 51.9,31.3 C1.2
N$34  (via drill 0.4)
  Top 0.16: IC5.6 99.64,23.16 99.4,23.4 87,23.4 86.6,23 81.2,23 79.6,24.6 79.6,26.6 79.4,26.8 77.2,26.8 77,26.6 77,25 76.4,24.4 74.8,24.4 74.4,24.8 74.4,26.4 v73.8,27 66.2,27 65.6,26.4 60.4,26.4 60.4,27.8 63.4,27.8 63.4,30.3 55.3,30.3 55.3,27.7 58.2,27.7 58.2,26.5 54.4,26.5 54.4,31.6 63.6,31.6 | 79.2,27.2 76.8,27.2 74.8,29.2 72.6,29.2 70.2,31.6 63.6,31.6 | 63.6,31.6 63.6,32.8 | 63.6,32.8 63.6,33.7 62.9,34.4 62.9,35.2 | 66.4,26.7 v65.3,25.6 65.3,25 64.9,24.6 63.8,24.6 63.2,25.2 60,25.2 60,27.7 58.6,27.7 58.6,25.2 52.7,25.2 52.4,25.5 45.4,25.5 44.9,26 44.9,26.9 42.5,29.3 42.5,33 43.5,34 50.5,34 51.7,32.8 58.2,32.8 58.7,33.3 60.1,33.3 60.6,32.8 63.6,32.8 | 64.2,32.5 65.3,32.5 65.8,33 65.8,36.5 65.7,36.6 63.1,36.6 62.9,36.4 62.9,35.2 | 62.9,35.2 54.6,35.2 54.3,34.9 54.3,33.2
  Top 0.3: IC5.2 98.36,14.84 98.6,14.6 v101.8,14.6 107.8,14.6 109,15.8 112.6,15.8 113,15.4 113,14.1 IC13.3 113.1,13.1 113.6,12.6 R39.P$1 112.2,11 112,10.8 112,8.2 111.8,8 R40.P$1 109.4,9 106.6,9 106.25,8.65 IC14.2 | v102.8,17.4 102.2,17.4 99.64,19.96 IC5.6
  Bottom 0.16: v73.8,27 74.4,26.4 74.4,25 74.85,24.55 76.55,24.55 77,25 77,26.6 76.8,26.8 74.5,26.8 | v65.3,25.6 65.3,25 64.9,24.6 63.8,24.6 63.6,24.8 63.6,33.9 63.8,34.1 65.1,34.1 65.3,33.9 v65.3,25.6
  Bottom 0.3: v102.8,17.4 102.8,15.6 v101.8,14.6
N$35
  Top 0.5: IC4.8 80.81,14.35 C5.2
N$36
  Top 0.5: IC4.1 84.73,25.61 C7.2
N$37
  Top 0.4: R6.P$2 R2.P$1 44.8,32.4 44,31.6 C2.2
N$38
  Top 0.2: R5.P$1 52.4,26.6 53.17,25.82 IC12.15
N$39
  Top 0.5: X2.1 67.92,74.32 68,74.4 R59.P$2
  Top 1: R58.2 67.92,71.18 X2.1
N$40
  Top 0.3: IC5.3 99.64,17.77 99.2,18.2 96,18.2 95.4,18.8 R34.P$2 C8.2
N$41
  Top 0.2: R6.P$1 46.6,28 46.8,28.2 53.2,28.2 53.8,28.8 53.8,31.8 54.17,32.17 IC12.10
N$42
  Top 0.3: RN1.19 RN1.20
N$43  (via drill 0.4)
  Top 0.16: v31,33 30.8,32.8 27.2,32.8 27.2,31.6 31,31.6 31.4,31.2 31.8,31.2 32.2,31.6 32.2,33 31.6,33.6 | v31,24 31,24.8 30.6,25.2 27.4,25.2 27.4,26.4 | 31.4,24.4 31.4,26.4 27.4,26.4 | IC8.5 43.6,15 41,15 41,17 49.4,17 49.4,14.2 45,14.2 | 27.4,26.4 22.3,26.4 22.3,31.6 25.1,31.6 25.3,31.4 26.4,31.4 26.6,31.6 26.6,32.8 26.5,32.9 25.3,32.9 25.2,32.8 21.1,32.8 21.1,26 21.9,25.2 25.5,25.2 25.5,26.1
  Top 0.2: v45.6,15 43.7,15 IC8.5 | 31.6,33.6 30.6,33.6 30.6,34.8 32.2,36.4 33.4,36.4 33.8,36 36.4,36 36.6,36.2 36.6,38.2 36.4,38.4 32.8,38.4 32,37.6 32,36.8 30.4,35.2 | v37.8,21.6 37.8,22.2 37.6,22.4 37.6,23.45 T5.1 37.6,23.55 37.6,25.6 34.15,29.05 RN2.7
  Bottom 0.16: v45.6,15 39,15 v31,24 29.6,25.4 29.6,26.6 30,27 30.8,27 31.8,28 31.8,29.8 30.4,31.2 | 43,15.4 43,17 42.4,17.6 38.8,17.6 31.8,25.6 31.8,26 33.4,27.6 33.4,32.2 32.6,33 v31,33 30.4,32.4
  Bottom 0.2: 30.4,32.4 27,32.4 26.6,32.8 26.6,33.8 26.8,34 29.8,34 32.2,36.4 34.6,36.4 35.4,37.2 35.4,37.6 34.8,38.2 32.6,38.2 29.4,35 25.4,35 24.8,34.4 24.8,31.8 25.2,31.4 26.4,31.4 27,32 30.2,32 30.4,31.8 30.4,31.2 | v45.6,15 45.6,17.4 44.8,18.2 39,18.2 37.8,19.4 v37.8,21.6
N$44
  Top 0.2: IC1.9 4.45,68.44 4.2,68.2 4.2,51.4 4.5,51.09 IC2.14
N$45
  Top 0.3: RN1.17 RN1.18
N$46  (via drill 0.4)
  Top 0.2: v13.4,58.6 13.8,59 R27.P$2 | v7.8,58.6 7.8,60.2 7.17,60.83 IC1.15
  Bottom 0.2: v13.4,58.6 v7.8,58.6
N$47
  Top 0.2: IC1.1 13.15,59.55 14.6,61 R25.P$2
N$48
  Top 0.2: IC1.2 13.22,60.83 15.4,63 R28.P$2
N$49
  Top 0.2: IC1.3 13.7,62.09 16.6,65 R26.P$2
N$50  (via drill 0.4)
  Top 0.2: IC11.26 4.1,32.5 3,33.6 3,36.6 v2.6,37 | v4,37 4,37.6 4.63,38.23 U1.7
  Bottom 0.2: v2.6,37 v4,37
N$51
  Top 0.2: IC11.25 4.2,33 3.37,33.84 U1.6
N$52  (via drill 0.4)
  Top 0.2: 9.5,29.5 9.4,29.6
  Top 0.3: IC11.6 8.5,29.9 8.8,29.6 9.4,29.6 | C15.1 9.5,29.5 v10,30 | v10,36 10,36.8 9.4,37.4 9.4,38.4 8.8,39 7.85,39 C14.2 7.75,39 6.8,39 6.26,39.54 U1.8
  Bottom 0.3: v10,36 v10,30
N$53  (via drill 0.4)
  Top 0.2: R52.P$1 v12.8,22 R53.P$2 | IC11.8 10.7,31.5 11.2,32 11.2,32.4 12,33.2 v13.2,33.2
  Bottom 0.2: v13.2,33.2 13.6,32.8 13.6,22.2 13.4,22 v12.8,22
N$54  (via drill 0.4)
  Top 0.2: IC2.15 7.97,49.83 v8,49.8 | v10,48.4 10.8,47.6 12.6,47.6 R29.P$2
  Bottom 0.2: v8,49.8 8.6,49.8 v10,48.4
N$55
  Top 0.16: IC2.1 13.64,48.55 14.4,47.8 15.4,47.8 15.8,47.4
  Top 0.2: 15.8,47.4 R21.P$2
N$56
  Top 0.5: USB1.GND@2 USB1.GND@1 5.1,25.2 1.8,25.2 1.4,25.6 R54.P$1 1.45,27.55 C17.2
N$57
  Top 0.2: T1.3 25,66.2 25.6,66.8 33.8,66.8 34,66.6 35,66.6 35.2,66.8 35.2,69.4 35.4,69.6 36,69.6 36,75.2 | 36,75.2 36,77.6 36.4,78 37.4,78 37.6,78.2 R15.P$1 | R62.P$1 28,75.6 28.4,75.2 36,75.2
N$58  (via drill 0.4)
  Top 0.2: v65.4,15.6 64.91,15.1 IC3.3 IC3.14 | 78.4,24.6 77.8,24 73.4,24 71.4,22 v71.4,15.6 72.6,15.6 73.8,14.4 73.8,12 74.44,11.37 IC15.2 | 78.4,24.6 78.4,25.48 IC4.2 | R34.P$1 81,22 78.4,24.6
  Bottom 0.2: v65.4,15.6 v71.4,15.6
N$59  (via drill 0.4)
  Top 0.16: IC2.2 10.62,49.83 v10.4,49.6 | v18,45.4 R30.P$2
  Bottom 0.16: v10.4,49.6 16,49.6 18,47.6 v18,45.4
N$60
  Top 0.2: IC2.3 13.51,51.09 14,50.6 14,49.4 14.4,49 R22.P$2
N$61
  Top 0.2: T2.1 14.35,75.85 13.8,76.4 13.8,77.8 12.8,78.8 R13.P$2 12.8,81.8 13.4,82.4 25.6,82.4 27.3,80.7 D3.A
N$62
  Top 0.2: R62.P$2 D4.K
N$63
  Top 0.2: IC2.4 13.63,52.37 14,52 14,51.2 14.2,51 R31.P$2
N$64
  Top 0.2: T1.1 24.05,56.15 24.4,55.8 R7.P$1
N$65  (via drill 0.4)
  Top 0.3: R55.P$1 v64.4,33.4 | IC12.2 63.98,25.82 v64.4,25.4
  Bottom 0.3: v64.4,33.4 v64.4,25.4
N$66
  Top 0.5: R60.P$2 R59.P$1
N$67  (via drill 0.4)
  Top 0.2: IC3.11 58.1,18.91 58.4,19.2 v58.4,19.4 | v57.8,23 v62.4,23 | v74.6,22.4 v78.2,22.4 | v86.8,26.8 R41.P$1
  Bottom 0.2: v58.4,19.4 58.4,19.6 57.8,20.2 v57.8,23 | v62.4,23 63,22.4 v74.6,22.4 | v86.8,26.8 84.8,26.8 80.4,22.4 v78.2,22.4
N$68
  Top 0.2: IC2.7 13.38,56.17 14.2,57 R24.P$2
N$69
  Top 0.2: IC2.6 15.3,54.91 R32.P$2
N$70
  Top 0.2: IC2.5 13.77,53.63 14.4,53 R23.P$2
N$71
  Top 0.2: RN2.5 RN2.6
N$72
  Top 0.2: RN2.12 RN2.11
N$73  (via drill 0.4)
  Top 0.2: IC9.14 IC9.3 31.7,27.09 32.8,26 v33.2,26 | RN2.15 37.68,29.68 v37,29
  Bottom 0.2: v33.2,26 34,26 v37,29
N$74  (via drill 0.4)
  Top 0.2: v41.8,16.4 42.16,16.36 IC8.6 45.84,16.36 46.8,15.4 C12.P$1 | IC9.2 30.57,25.82 v30.6,25.8 | IC9.7 31.43,32.17 v31.6,32
  Bottom 0.2: v41.8,16.4 39,16.4 v30.6,25.8 32.4,27.6 32.4,31.2 v31.6,32
N$75
  Top 0.2: RN2.1 RN2.2 RN2.3 RN2.4 32.35,30.95 32,30.6 31,30.6 30.65,30.95 28.96,30.95 IC9.6 IC9.11
N$76
  Top 0.2: IC7.14 IC7.3 29.3,16.09 29.6,16.4 R45.P$1
N$77
  Top 0.2: RN2.17 RN2.16
N$78
  Top 0.2: IC8.1 36.9,18.91 36.6,19.2 T5.3
N$79
  Top 0.2: R46.P$2 34.2,23 34.7,23.5 T5.2 35.65,26.75 34.62,27.78 RN2.9
N$80  (via drill 0.4)
  Top 0.2: IC9.15 21.98,25.82 21.6,26.2 21.6,32 21.8,32.2 23.69,32.2 IC9.10 25.77,32.17 v25.8,32.2 | v34.2,37.3 T6.1
  Bottom 0.2: v25.8,32.2 25.8,34 26.2,34.4 29.7,34.4 32.6,37.3 v34.2,37.3
N$81
  Top 0.2: IC7.11 24.7,19.91 25.98,21.18 IC7.7 30.18,21.18 34.2,24.6 34.2,27 34.06,27.14 RN2.10
N$82
  Top 0.3: T3.1 98.75,12.55 99.6,13.4 R35.P$1 R37.P$1 109,13.4 109.35,13.05 IC13.2
N$83
  Top 0.3: R37.P$2 108.2,10.2 109,11 R39.P$2 111.2,11 112,11.8 112,14.6 111.65,14.95 IC13.1
N$84
  Top 0.2: IC8.7 45.84,17.64 46.8,18.6 C12.P$2 48,19.4 47.3,20.1 D1.A
N$85
  Top 0.2: R45.P$2 33.6,19.6 34.2,19 R46.P$1
N$86  (via drill 0.4)
  Top 0.2: R47.P$2 50.7,18.7 D1.C 49.4,21 49,21.4 49,24.4 48.6,24.8 45,24.8 44,25.8 44,26.8 42.8,28 42,28 41,29 v41,39.8 | T6.3 36.7,39.6 36.7,41.1 v36.6,41.2
  Bottom 0.2: v36.6,41.2 39.6,41.2 v41,39.8
N$87
  Top 0.2: IC7.2 27.94,14.8 32.6,14.8 | IC7.6 29.3,19.91 29.6,19.6 29.6,18.4 30,18 32.4,18 32.6,17.8 32.6,14.8 | IC8.2 36.63,17.64 34,14.8 32.6,14.8
N$88
  Top 0.2: 33.15,40 T7.1 T7.2 33.1,45 | 33.1,45 33.1,49.7 R49.P$2 | T9.1 33.2,44.9 33.1,45
N$89
  Top 0.3: RN1.15 RN1.16
N$90
  Top 0.3: RN1.13 RN1.14
N$91
  Top 0.2: R44.P$2 R43.P$2 74.6,8.2 74.8,8.4 80.4,8.4 80.8,8 81.65,8 IC6.1
N$92
  Top 0.3: R40.P$2 113.6,4.8 113.4,4.6 R38.P$2 111.4,4.6 108.2,7.8 IC14.1
N$93
  Top 0.2: T6.2 38.5,37.3 39,37.8 39,41.8 38,42.8 38,44.85 T9.2
N$94
  Top 0.2: T9.3 D2.A
N$95
  Top 0.2: RN1.4 RN1.5
  Top 0.3: RN1.4 84.05,33.05 84.77,33.77 IC10.3
N$96  (via drill 0.4)
  Top 0.3: IC10.2 84.23,35.03 84.15,34.95 RN1.7 81.65,34.95 81.6,35 v81,35 | RN1.2 81.22,31.78 v81,32
  Bottom 0.3: v81,32 v81,35
N$98
  Top 0.4: X4.2 56,66.9 55,67.7 45.7,67.7 44.2,66.2 44.2,42.4 U$8.2 46.4,42.2 R51.P$1
  Top 0.5: P3.TP 56.12,66.8 X4.2
N$99
  Top 0.4: X3.2 47.42,64.92 46,63.5 46,45.5 47,44.5 48.6,44.5 49.4,43.7 R50.P$1 50.6,42 50.8,42.2 U$7.2
  Top 0.5: P2.TP 47.58,65 X3.2
N$100
  Top 0.3: U$2.2 56.4,44.3 56.6,44.5 | R19.P$1 59.2,44.5
  Top 0.4: K1.1 63.4,46.18 63.4,45.2 62.7,44.5 59.2,44.5 56.6,44.5 52.5,44.5 52,45 K4.1
N$101  (via drill 0.4)
  Top 0.2: v39.2,47.8 39.2,58.4 39,58.6 37.1,58.6 U$1.2 33.1,58.7 R8.P$1
  Bottom 0.3: K3.1 58,47.6 57.8,47.8 v39.2,47.8
N$102
  Top 0.2: R13.P$1 14.8,80.2 14.6,80 14.6,78.05 T2.2
  Top 0.4: JP1.7 15.65,74.45 16.6,75.4 16.6,77.4 16.2,77.8 14.95,77.8 T2.2
N$103
  Top 0.2: T10.1 36.95,71.35 37.4,71.8 R61.P$2 37.4,74.6 37.6,74.8 37.6,76.5 D4.A
N$104
  Top 0.2: IC15.3 77.64,12.63 78,13 78,15.72 IC4.6
N$106  (via drill 0.4)
  Top 0.4: T2.3 12,76.8 11.6,76.4 11.6,73.4 10.4,72.2 2.4,72.2 1.4,71.2 C4.2 1.45,50.2 v2.8,50.2 | U1.1 5.91,46.3 v5.2,47
  Bottom 0.4: v5.2,47 4.2,47 3.2,48 3.2,49.8 v2.8,50.2
N$107
  Top 0.2: R15.P$2 D3.K
N$108
  Top 0.2: RN2.20 RN2.19 RN2.18 38.81,31.6 40,31.6 40.4,31.2 40.4,29 | RN2.14 40.35,29.05 40.4,29 | T13.3 41.3,23.5 42,24.2 43.3,24.2 D5.A | D5.A 43.4,26.6 42.8,27.2 41.7,27.2 40.4,28.5 40.4,29 | D5.A 45.3,24.1 46,23.4 R48.P$2
N$117  (via drill 0.4)
  Top 0.2: R68.P$1 R67.P$1 44.4,3.2 44.6,3.4 v44.6,6.6 | T13.1 39.65,21.45 40.6,22.4 45.4,22.4 45.8,22 v45.8,19
  Bottom 0.2: v45.8,19 46.4,18.4 46.4,12.4 44.8,10.8 44.8,6.8 v44.6,6.6
N$118
  Top 0.2: T14.3 R68.P$2
N$119
  Top 0.2: T14.1 31.55,4.15 31,3.6 R69.P$2
OHM_CUR
  Top 0.2: R8.P$2 R49.P$1 35.6,53 35.8,53.2 36.98,53.2 D2.K U$1.1
SR_CLK  (via drill 0.4)
  Top 0.2: IC1.11 7.71,65.91 8.2,66.4 8.2,66.6 | 8.2,66.6 8.4,66.8 8.4,70 8.2,70.2 v8.2,70.6 | IC2.11 8.9,54.91 9.2,55.2 9.2,66 v9.6,66.4 | v8,66.4 8.2,66.6
  Bottom 0.2: JP1.3 25.81,71.21 24.8,70.2 9.8,70.2 9.4,69.8 8.6,69.8 8.2,70.2 v8.2,70.6 | v9.6,66.4 v8,66.4
SR_DAT  (via drill 0.4)
  Top 0.2: IC1.14 8.1,62.09 8.8,62.8 8.8,70.2 v9.2,70.6
  Bottom 0.2: JP1.4 23.27,71.07 22.8,70.6 v9.2,70.6
SR_LAT  (via drill 0.4)
  Top 0.2: v10,71.4 7.8,71.4 7.4,71 7.4,68.6 v7.6,68.4 | v7.6,65 7.24,64.64 IC1.12 4.83,64.64 4.6,64.4 4.6,53.8 4.76,53.63 IC2.12
  Bottom 0.2: JP1.5 20.73,71.73 20,71 10.4,71 v10,71.4 | v7.6,68.4 7.2,68.4 6.8,68 6.8,65.8 7,65.6 v7.6,65
T_INP
  Top 0.4: K3.4 K1.4 K2.4
  Top 0.5: X2.2 78.08,71.28 74.2,67.4 74.2,62.4 73.4,61.6 70.02,61.6 K2.4
  Top 1: P1.TP 78.08,79 X2.2
T_SENH
  Top 0.4: R1.P$2 R50.P$2 U$7.1
T_SENL
  Top 0.4: R2.P$2 R51.P$2 U$8.1
V+  (via drill 0.4)
  Top 0.3: IC5.7 98.36,19.64 v98.4,19.6 96.8,19.6 95.8,20.6 92.2,20.6 91.95,20.85 C9.1 | v96.2,10.6 97.65,10.6 T3.2 | 78.2,18.06 IC4.7
  Top 0.5: C9.1 79.05,20.85 78.2,20 78.2,18.06
  Bottom 0.3: v98.4,19.6 98.4,12.8 v96.2,10.6
V-  (via drill 0.4)
  Top 0.3: v105.8,15.6 102.6,15.6 101.8,16.4 IC5.4 100.91,17.7 99.8,18.8 96.6,18.8 95.4,20 92.2,20 90.95,18.75 C9.2 | C10.2 C9.2 | 89.85,18.6 C9.2 | T4.2 108.05,3.95 107.8,4.2 106.6,4.2 v105.8,5
  Top 0.5: 89.85,18.6 89,18.6 88.14,19.46 C7.1 85.6,19.4 85.54,14.66 C5.1
  Bottom 0.3: v105.8,15.6 v105.8,5
  Bottom 0.5: C7.1 78.94,19.46 73.2,25.2 IC4.4
V_REL  (via drill 0.4)
  Top 0.4: v36,66.4 T10.3
  Bottom 0.4: K2.2 K1.2 K3.2 K4.2 45.54,51.46 41.6,55.4 41.6,61 36.2,66.4 v36,66.4
VCC  (via drill 0.4)
  Top 0.2: IC7.12 25.16,18.64 v25.2,18.6 | IC9.12 26.16,29.64 v26.2,29.6 | v59.2,17.2 58.77,17.64 IC3.12 | v58.8,9.8 58.8,9.6 58.6,9.4 | 58.77,29.64 v58.8,29.6 | R42.P$1 86.4,7.2 85.25,6.05 IC6.2 79.95,6.05 79,7 R43.P$1
  Top 0.25: 77.8,5.2 R43.P$1
  Top 0.3: v25.6,12.6 30.4,12.6 32.4,10.6 57.4,10.6 58.6,9.4 63.2,4.8 77.4,4.8 77.8,5.2 | IC12.12 58.8,29.64 v58.8,29.6
  Bottom 0.2: v25.6,12.6 25,13.2 25,17.4 25.2,17.6 v25.2,18.6 25.2,18.8 26.2,19.8 v26.2,29.6 | v58.8,9.8 59.2,10.2 v59.2,17.2 59.2,17.4 59,17.6 59,18.2 59.6,18.8 59.6,27.6 59.2,28 59.2,29.2 v58.8,29.6
VREF-7V  (via drill 0.4)
  Top 0.2: R41.P$2 92.2,28 v91.4,28.6 | IC7.15 21.57,14.82 21,15.4 21,19.8 v20.8,20
  Top 0.3: v90,11.2 90,10.2 88.8,9 61.2,9 59,11.2 34,11.2 33.8,11.4 v32.8,11.4 | v20.8,20 20.8,20.8 21.2,21.2 22.69,21.2 IC7.10
  Bottom 0.2: v91.4,28.6 90,28.6
  Bottom 0.3: v90,11.2 90,28.6 90,34 96.46,40.46 JP3.1 | v32.8,11.4 30.8,11.4 28.2,8.6 27.2,8.6 23.2,12.6 23.2,17.6 v20.8,20

## Text on the board
Top: minivm_exp_rev2